# Altium PCB PCB.PcbDoc (part 3 of 3)
Units mm, origin at the board's own origin, x right, y up, seen from the top; angles counter-clockwise.
Board outline 60.66 x 261 mm, 2 copper layers (Top Layer, Bottom Layer); 258 components, 193 nets, 900 pads, 4 vias.
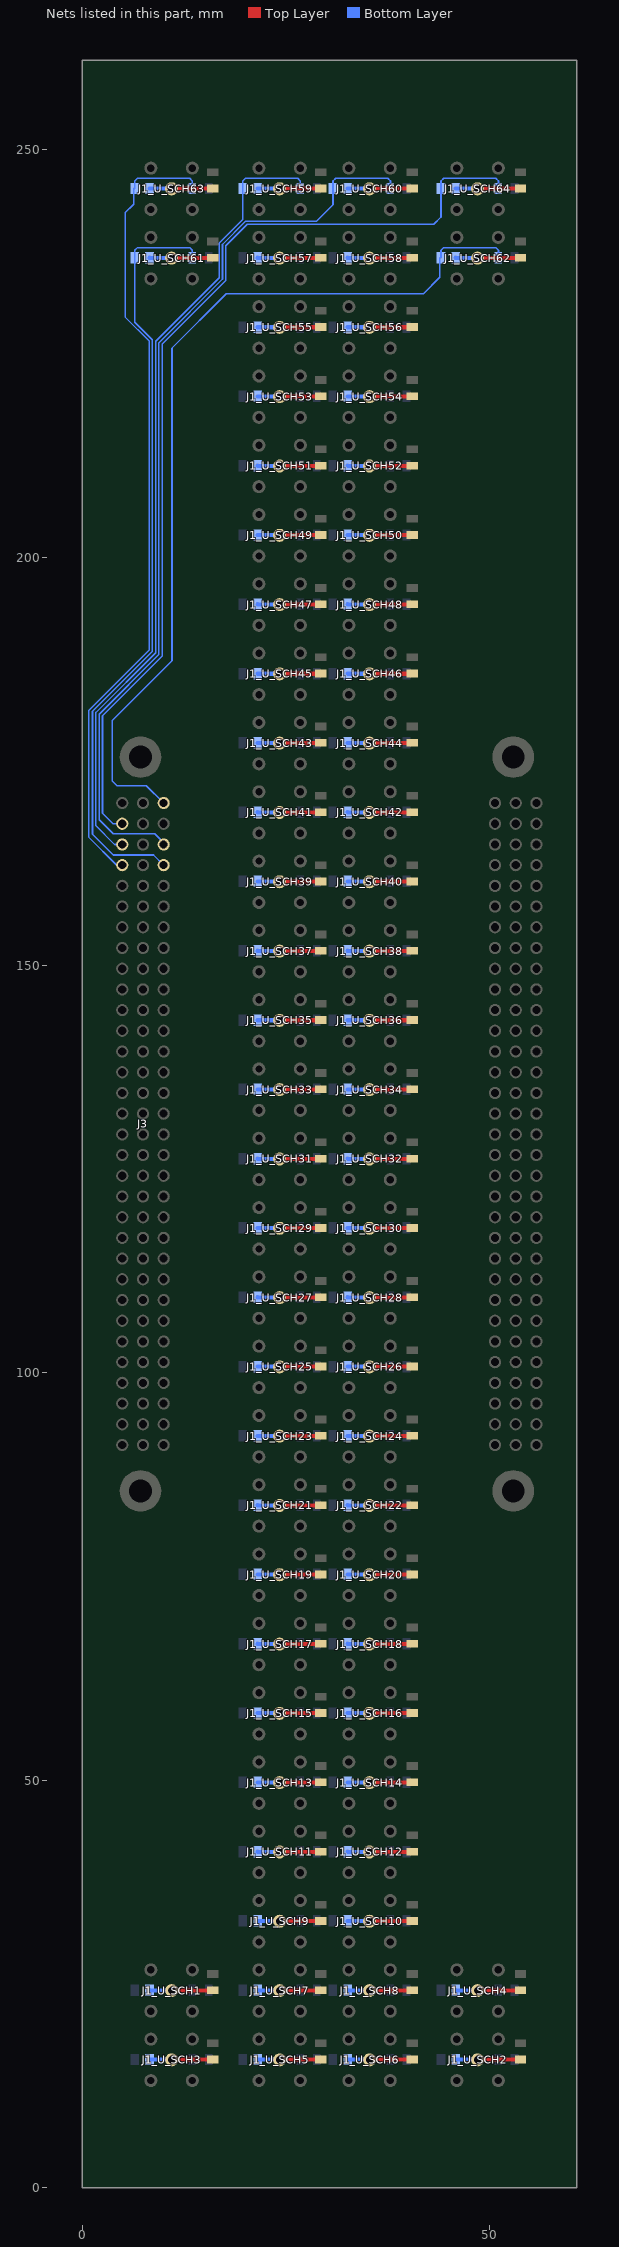
[diagram p3: the nets of this part, all layers, seen from the top]

## Via types
v1: diameter 3, hole 3, Top Layer to Bottom Layer, 4 vias

## Nets (pads, with @x,y where several pads share a name; then routed paths per layer and width w, separated by ;. In a path a pad name is that pad's centre, name@x,y a point inside that pad or via, vN(x,y) a via of type N, cw(c..) or ccw(c..) an arc to the next point about the centre after c; other vN are vias at no path point) (continued)
INPUT_T59: C1_U_SCH59.2 J3.a30 R2_U_SCH59.2 | length 99
  Bottom Layer w0.2: J3.a30@4.93,164.79 3.99,164.79 1.7,167.08 1.7,180.975 9.025,188.3 9.025,226.5 16.825,234.3 16.825,238.55 19.725,241.45 C1_U_SCH59.2@19.725,245.25 19.725,246.175 20.05,246.5 26.45,246.5 26.775,246.175 R2_U_SCH59.2@26.775,245.25
INPUT_T60: C1_U_SCH60.2 J3.c30 R2_U_SCH60.2 | length 112.9
  Bottom Layer w0.2: J3.c30@10.01,164.79 10.01,165.015 8.925,166.1 3.825,166.1 2.1,167.825 2.1,180.775 9.425,188.1 9.425,226.334 17.225,234.134 17.225,238.384 20.091,241.25 28.775,241.25 30.775,243.25 C1_U_SCH60.2@30.775,245.25 30.775,246.175 31.1,246.5 37.5,246.5 37.825,246.175 R2_U_SCH60.2@37.825,245.25
INPUT_T61: C1_U_SCH61.2 J3.c29 R2_U_SCH61.2 | length 94.1
  Bottom Layer w0.2: J3.c29@10.01,162.25 8.76,163.5 3.825,163.5 1.279,166.046 1.279,181.12 8.625,188.466 8.625,226.7 6.475,228.85 C1_U_SCH61.2@6.475,236.75 6.475,237.675 6.8,238 13.2,238 13.525,237.675 R2_U_SCH61.2@13.525,236.75
INPUT_T62: C1_U_SCH62.2 J3.c32 R2_U_SCH62.2 | length 111.6
  Bottom Layer w0.2: J3.c32@10.01,169.87 7.88,172 4.275,172 3.7,172.575 3.7,180 11.025,187.325 11.025,217.615 11.025,225.672 17.703,232.35 41.875,232.35 43.875,234.35 C1_U_SCH62.2@43.875,236.75 ; C1_U_SCH62.2@44.025,236.75 44.025,237.675 44.35,238 50.75,238 51.075,237.675 R2_U_SCH62.2@51.075,236.75
INPUT_T63: C1_U_SCH63.2 J3.a29 R2_U_SCH63.2 | length 99
  Bottom Layer w0.2: J3.a29@4.93,162.25 4.25,162.25 0.8,165.7 0.8,181.206 8.225,188.631 8.225,226.534 5.275,229.484 5.275,242.275 6.325,243.325 C1_U_SCH63.2@6.325,245.25 ; C1_U_SCH63.2@6.475,245.25 6.475,246.175 6.8,246.5 13.2,246.5 13.525,246.175 R2_U_SCH63.2@13.525,245.25
INPUT_T64: C1_U_SCH64.2 J3.a31 R2_U_SCH64.2 | length 119.4
  Bottom Layer w0.2: J3.a31@4.93,167.33 3.795,167.33 2.5,168.625 2.5,180.575 9.825,187.9 9.825,226.169 17.625,233.969 17.625,238.219 20.256,240.85 43.125,240.85 44.025,241.75 C1_U_SCH64.2@44.025,245.25 44.025,246.175 44.35,246.5 50.75,246.5 51.075,246.175 R2_U_SCH64.2@51.075,245.25
NetC1_U_SCH1_1: C1_U_SCH1.1 J1_U_SCH1.1 R1_U_SCH1.1 | length 7.9
  Top Layer w0.5: J1_U_SCH1.1@10.965,24.23 J1_U_SCH1.1@10.985,24.21 11.005,24.23 16.005,24.23 R1_U_SCH1.1@16.025,24.25
  Bottom Layer w0.5: C1_U_SCH1.1@8.275,24.25 8.295,24.23 10.965,24.23 J1_U_SCH1.1@10.985,24.21 J1_U_SCH1.1@11.025,24.25
NetC1_U_SCH2_1: C1_U_SCH2.1 J1_U_SCH2.1 R1_U_SCH2.1 | length 8
  Top Layer w0.5: J1_U_SCH2.1@48.615,15.66 48.595,15.68 48.645,15.73 53.755,15.73 R1_U_SCH2.1@53.775,15.75
  Bottom Layer w0.5: C1_U_SCH2.1@45.825,15.75 45.845,15.73 48.495,15.73 J1_U_SCH2.1@48.515,15.71 J1_U_SCH2.1@48.555,15.75
NetC1_U_SCH3_1: C1_U_SCH3.1 J1_U_SCH3.1 R1_U_SCH3.1 | length 7.9
  Top Layer w0.5: J1_U_SCH3.1@10.965,15.73 J1_U_SCH3.1@10.985,15.71 11.005,15.73 16.005,15.73 R1_U_SCH3.1@16.025,15.75
  Bottom Layer w0.5: C1_U_SCH3.1@8.275,15.75 8.295,15.73 10.965,15.73 J1_U_SCH3.1@10.985,15.71 J1_U_SCH3.1@11.025,15.75
NetC1_U_SCH4_1: C1_U_SCH4.1 J1_U_SCH4.1 R1_U_SCH4.1 | length 8
  Top Layer w0.5: J1_U_SCH4.1@48.615,24.16 48.595,24.18 48.645,24.23 53.755,24.23 R1_U_SCH4.1@53.775,24.25
  Bottom Layer w0.5: C1_U_SCH4.1@45.825,24.25 45.845,24.23 48.495,24.23 J1_U_SCH4.1@48.515,24.21 J1_U_SCH4.1@48.555,24.25
NetC1_U_SCH5_1: C1_U_SCH5.1 J1_U_SCH5.1 R1_U_SCH5.1 | length 7.9
  Top Layer w0.5: J1_U_SCH5.1@24.215,15.73 J1_U_SCH5.1@24.235,15.71 24.255,15.73 29.255,15.73 R1_U_SCH5.1@29.275,15.75
  Bottom Layer w0.5: C1_U_SCH5.1@21.525,15.75 21.545,15.73 24.215,15.73 J1_U_SCH5.1@24.235,15.71 J1_U_SCH5.1@24.275,15.75
NetC1_U_SCH6_1: C1_U_SCH6.1 J1_U_SCH6.1 R1_U_SCH6.1 | length 8
  Top Layer w0.5: J1_U_SCH6.1@35.365,15.66 35.345,15.68 35.395,15.73 40.505,15.73 R1_U_SCH6.1@40.525,15.75
  Bottom Layer w0.5: C1_U_SCH6.1@32.575,15.75 32.595,15.73 35.245,15.73 J1_U_SCH6.1@35.265,15.71 J1_U_SCH6.1@35.305,15.75
NetC1_U_SCH7_1: C1_U_SCH7.1 J1_U_SCH7.1 R1_U_SCH7.1 | length 7.9
  Top Layer w0.5: J1_U_SCH7.1@24.215,24.23 J1_U_SCH7.1@24.235,24.21 24.255,24.23 29.255,24.23 R1_U_SCH7.1@29.275,24.25
  Bottom Layer w0.5: C1_U_SCH7.1@21.525,24.25 21.545,24.23 24.215,24.23 J1_U_SCH7.1@24.235,24.21 J1_U_SCH7.1@24.275,24.25
NetC1_U_SCH8_1: C1_U_SCH8.1 J1_U_SCH8.1 R1_U_SCH8.1 | length 8
  Top Layer w0.5: J1_U_SCH8.1@35.365,24.16 35.345,24.18 35.395,24.23 40.505,24.23 R1_U_SCH8.1@40.525,24.25
  Bottom Layer w0.5: C1_U_SCH8.1@32.575,24.25 32.595,24.23 35.245,24.23 J1_U_SCH8.1@35.265,24.21 J1_U_SCH8.1@35.305,24.25
NetC1_U_SCH9_1: C1_U_SCH9.1 J1_U_SCH9.1 R1_U_SCH9.1 | length 7.9
  Top Layer w0.5: J1_U_SCH9.1@24.215,32.73 J1_U_SCH9.1@24.235,32.71 24.255,32.73 29.255,32.73 R1_U_SCH9.1@29.275,32.75
  Bottom Layer w0.5: C1_U_SCH9.1@21.525,32.75 21.545,32.73 24.215,32.73 J1_U_SCH9.1@24.235,32.71 J1_U_SCH9.1@24.275,32.75
NetC1_U_SCH10_1: C1_U_SCH10.1 J1_U_SCH10.1 R1_U_SCH10.1 | length 8
  Top Layer w0.5: J1_U_SCH10.1@35.365,32.66 35.345,32.68 35.395,32.73 40.505,32.73 R1_U_SCH10.1@40.525,32.75
  Bottom Layer w0.5: C1_U_SCH10.1@32.575,32.75 32.595,32.73 35.245,32.73 J1_U_SCH10.1@35.265,32.71 J1_U_SCH10.1@35.305,32.75
NetC1_U_SCH11_1: C1_U_SCH11.1 J1_U_SCH11.1 R1_U_SCH11.1 | length 7.9
  Top Layer w0.5: J1_U_SCH11.1@24.215,41.23 J1_U_SCH11.1@24.235,41.21 24.255,41.23 29.255,41.23 R1_U_SCH11.1@29.275,41.25
  Bottom Layer w0.5: C1_U_SCH11.1@21.525,41.25 21.545,41.23 24.215,41.23 J1_U_SCH11.1@24.235,41.21 J1_U_SCH11.1@24.275,41.25
NetC1_U_SCH12_1: C1_U_SCH12.1 J1_U_SCH12.1 R1_U_SCH12.1 | length 8
  Top Layer w0.5: J1_U_SCH12.1@35.365,41.16 35.345,41.18 35.395,41.23 40.505,41.23 R1_U_SCH12.1@40.525,41.25
  Bottom Layer w0.5: C1_U_SCH12.1@32.575,41.25 32.595,41.23 35.245,41.23 J1_U_SCH12.1@35.265,41.21 J1_U_SCH12.1@35.305,41.25
NetC1_U_SCH13_1: C1_U_SCH13.1 J1_U_SCH13.1 R1_U_SCH13.1 | length 7.9
  Top Layer w0.5: J1_U_SCH13.1@24.215,49.73 J1_U_SCH13.1@24.235,49.71 24.255,49.73 29.255,49.73 R1_U_SCH13.1@29.275,49.75
  Bottom Layer w0.5: C1_U_SCH13.1@21.525,49.75 21.545,49.73 24.215,49.73 J1_U_SCH13.1@24.235,49.71 J1_U_SCH13.1@24.275,49.75
NetC1_U_SCH14_1: C1_U_SCH14.1 J1_U_SCH14.1 R1_U_SCH14.1 | length 8
  Top Layer w0.5: J1_U_SCH14.1@35.365,49.66 35.345,49.68 35.395,49.73 40.505,49.73 R1_U_SCH14.1@40.525,49.75
  Bottom Layer w0.5: C1_U_SCH14.1@32.575,49.75 32.595,49.73 35.245,49.73 J1_U_SCH14.1@35.265,49.71 J1_U_SCH14.1@35.305,49.75
NetC1_U_SCH15_1: C1_U_SCH15.1 J1_U_SCH15.1 R1_U_SCH15.1 | length 7.9
  Top Layer w0.5: J1_U_SCH15.1@24.215,58.23 J1_U_SCH15.1@24.235,58.21 24.255,58.23 29.255,58.23 R1_U_SCH15.1@29.275,58.25
  Bottom Layer w0.5: C1_U_SCH15.1@21.525,58.25 21.545,58.23 24.215,58.23 J1_U_SCH15.1@24.235,58.21 J1_U_SCH15.1@24.275,58.25
NetC1_U_SCH16_1: C1_U_SCH16.1 J1_U_SCH16.1 R1_U_SCH16.1 | length 8
  Top Layer w0.5: J1_U_SCH16.1@35.365,58.16 35.345,58.18 35.395,58.23 40.505,58.23 R1_U_SCH16.1@40.525,58.25
  Bottom Layer w0.5: C1_U_SCH16.1@32.575,58.25 32.595,58.23 35.245,58.23 J1_U_SCH16.1@35.265,58.21 J1_U_SCH16.1@35.305,58.25
NetC1_U_SCH17_1: C1_U_SCH17.1 J1_U_SCH17.1 R1_U_SCH17.1 | length 7.9
  Top Layer w0.5: J1_U_SCH17.1@24.215,66.73 J1_U_SCH17.1@24.235,66.71 24.255,66.73 29.255,66.73 R1_U_SCH17.1@29.275,66.75
  Bottom Layer w0.5: C1_U_SCH17.1@21.525,66.75 21.545,66.73 24.215,66.73 J1_U_SCH17.1@24.235,66.71 J1_U_SCH17.1@24.275,66.75
NetC1_U_SCH18_1: C1_U_SCH18.1 J1_U_SCH18.1 R1_U_SCH18.1 | length 8
  Top Layer w0.5: J1_U_SCH18.1@35.365,66.66 35.345,66.68 35.395,66.73 40.505,66.73 R1_U_SCH18.1@40.525,66.75
  Bottom Layer w0.5: C1_U_SCH18.1@32.575,66.75 32.595,66.73 35.245,66.73 J1_U_SCH18.1@35.265,66.71 J1_U_SCH18.1@35.305,66.75
NetC1_U_SCH19_1: C1_U_SCH19.1 J1_U_SCH19.1 R1_U_SCH19.1 | length 7.9
  Top Layer w0.5: J1_U_SCH19.1@24.215,75.23 J1_U_SCH19.1@24.235,75.21 24.255,75.23 29.255,75.23 R1_U_SCH19.1@29.275,75.25
  Bottom Layer w0.5: C1_U_SCH19.1@21.525,75.25 21.545,75.23 24.215,75.23 J1_U_SCH19.1@24.235,75.21 J1_U_SCH19.1@24.275,75.25
NetC1_U_SCH20_1: C1_U_SCH20.1 J1_U_SCH20.1 R1_U_SCH20.1 | length 8
  Top Layer w0.5: J1_U_SCH20.1@35.365,75.16 35.345,75.18 35.395,75.23 40.505,75.23 R1_U_SCH20.1@40.525,75.25
  Bottom Layer w0.5: C1_U_SCH20.1@32.575,75.25 32.595,75.23 35.245,75.23 J1_U_SCH20.1@35.265,75.21 J1_U_SCH20.1@35.305,75.25
NetC1_U_SCH21_1: C1_U_SCH21.1 J1_U_SCH21.1 R1_U_SCH21.1 | length 7.9
  Top Layer w0.5: J1_U_SCH21.1@24.215,83.73 J1_U_SCH21.1@24.235,83.71 24.255,83.73 29.255,83.73 R1_U_SCH21.1@29.275,83.75
  Bottom Layer w0.5: C1_U_SCH21.1@21.525,83.75 21.545,83.73 24.215,83.73 J1_U_SCH21.1@24.235,83.71 J1_U_SCH21.1@24.275,83.75
NetC1_U_SCH22_1: C1_U_SCH22.1 J1_U_SCH22.1 R1_U_SCH22.1 | length 8
  Top Layer w0.5: J1_U_SCH22.1@35.365,83.66 35.345,83.68 35.395,83.73 40.505,83.73 R1_U_SCH22.1@40.525,83.75
  Bottom Layer w0.5: C1_U_SCH22.1@32.575,83.75 32.595,83.73 35.245,83.73 J1_U_SCH22.1@35.265,83.71 J1_U_SCH22.1@35.305,83.75
NetC1_U_SCH23_1: C1_U_SCH23.1 J1_U_SCH23.1 R1_U_SCH23.1 | length 7.9
  Top Layer w0.5: J1_U_SCH23.1@24.215,92.23 J1_U_SCH23.1@24.235,92.21 24.255,92.23 29.255,92.23 R1_U_SCH23.1@29.275,92.25
  Bottom Layer w0.5: C1_U_SCH23.1@21.525,92.25 21.545,92.23 24.215,92.23 J1_U_SCH23.1@24.235,92.21 J1_U_SCH23.1@24.275,92.25
NetC1_U_SCH24_1: C1_U_SCH24.1 J1_U_SCH24.1 R1_U_SCH24.1 | length 8
  Top Layer w0.5: J1_U_SCH24.1@35.365,92.16 35.345,92.18 35.395,92.23 40.505,92.23 R1_U_SCH24.1@40.525,92.25
  Bottom Layer w0.5: C1_U_SCH24.1@32.575,92.25 32.595,92.23 35.245,92.23 J1_U_SCH24.1@35.265,92.21 J1_U_SCH24.1@35.305,92.25
NetC1_U_SCH25_1: C1_U_SCH25.1 J1_U_SCH25.1 R1_U_SCH25.1 | length 7.9
  Top Layer w0.5: J1_U_SCH25.1@24.215,100.73 J1_U_SCH25.1@24.235,100.71 24.255,100.73 29.255,100.73 R1_U_SCH25.1@29.275,100.75
  Bottom Layer w0.5: C1_U_SCH25.1@21.525,100.75 21.545,100.73 24.215,100.73 J1_U_SCH25.1@24.235,100.71 J1_U_SCH25.1@24.275,100.75
NetC1_U_SCH26_1: C1_U_SCH26.1 J1_U_SCH26.1 R1_U_SCH26.1 | length 8
  Top Layer w0.5: J1_U_SCH26.1@35.365,100.66 35.345,100.68 35.395,100.73 40.505,100.73 R1_U_SCH26.1@40.525,100.75
  Bottom Layer w0.5: C1_U_SCH26.1@32.575,100.75 32.595,100.73 35.245,100.73 J1_U_SCH26.1@35.265,100.71 J1_U_SCH26.1@35.305,100.75
NetC1_U_SCH27_1: C1_U_SCH27.1 J1_U_SCH27.1 R1_U_SCH27.1 | length 7.9
  Top Layer w0.5: J1_U_SCH27.1@24.215,109.23 J1_U_SCH27.1@24.235,109.21 24.255,109.23 29.255,109.23 R1_U_SCH27.1@29.275,109.25
  Bottom Layer w0.5: C1_U_SCH27.1@21.525,109.25 21.545,109.23 24.215,109.23 J1_U_SCH27.1@24.235,109.21 J1_U_SCH27.1@24.275,109.25
NetC1_U_SCH28_1: C1_U_SCH28.1 J1_U_SCH28.1 R1_U_SCH28.1 | length 8
  Top Layer w0.5: J1_U_SCH28.1@35.365,109.16 35.345,109.18 35.395,109.23 40.505,109.23 R1_U_SCH28.1@40.525,109.25
  Bottom Layer w0.5: C1_U_SCH28.1@32.575,109.25 32.595,109.23 35.245,109.23 J1_U_SCH28.1@35.265,109.21 J1_U_SCH28.1@35.305,109.25
NetC1_U_SCH29_1: C1_U_SCH29.1 J1_U_SCH29.1 R1_U_SCH29.1 | length 7.9
  Top Layer w0.5: J1_U_SCH29.1@24.215,117.73 J1_U_SCH29.1@24.235,117.71 24.255,117.73 29.255,117.73 R1_U_SCH29.1@29.275,117.75
  Bottom Layer w0.5: C1_U_SCH29.1@21.525,117.75 21.545,117.73 24.215,117.73 J1_U_SCH29.1@24.235,117.71 J1_U_SCH29.1@24.275,117.75
NetC1_U_SCH30_1: C1_U_SCH30.1 J1_U_SCH30.1 R1_U_SCH30.1 | length 8
  Top Layer w0.5: J1_U_SCH30.1@35.365,117.66 35.345,117.68 35.395,117.73 40.505,117.73 R1_U_SCH30.1@40.525,117.75
  Bottom Layer w0.5: C1_U_SCH30.1@32.575,117.75 32.595,117.73 35.245,117.73 J1_U_SCH30.1@35.265,117.71 J1_U_SCH30.1@35.305,117.75
NetC1_U_SCH31_1: C1_U_SCH31.1 J1_U_SCH31.1 R1_U_SCH31.1 | length 7.9
  Top Layer w0.5: J1_U_SCH31.1@24.215,126.23 J1_U_SCH31.1@24.235,126.21 24.255,126.23 29.255,126.23 R1_U_SCH31.1@29.275,126.25
  Bottom Layer w0.5: C1_U_SCH31.1@21.525,126.25 21.545,126.23 24.215,126.23 J1_U_SCH31.1@24.235,126.21 J1_U_SCH31.1@24.275,126.25
NetC1_U_SCH32_1: C1_U_SCH32.1 J1_U_SCH32.1 R1_U_SCH32.1 | length 8
  Top Layer w0.5: J1_U_SCH32.1@35.365,126.16 35.345,126.18 35.395,126.23 40.505,126.23 R1_U_SCH32.1@40.525,126.25
  Bottom Layer w0.5: C1_U_SCH32.1@32.575,126.25 32.595,126.23 35.245,126.23 J1_U_SCH32.1@35.265,126.21 J1_U_SCH32.1@35.305,126.25
NetC1_U_SCH33_1: C1_U_SCH33.1 J1_U_SCH33.1 R1_U_SCH33.1 | length 7.9
  Top Layer w0.5: J1_U_SCH33.1@24.215,134.73 J1_U_SCH33.1@24.235,134.71 24.255,134.73 29.255,134.73 R1_U_SCH33.1@29.275,134.75
  Bottom Layer w0.5: C1_U_SCH33.1@21.525,134.75 21.545,134.73 24.215,134.73 J1_U_SCH33.1@24.235,134.71 J1_U_SCH33.1@24.275,134.75
NetC1_U_SCH34_1: C1_U_SCH34.1 J1_U_SCH34.1 R1_U_SCH34.1 | length 8
  Top Layer w0.5: J1_U_SCH34.1@35.365,134.66 35.345,134.68 35.395,134.73 40.505,134.73 R1_U_SCH34.1@40.525,134.75
  Bottom Layer w0.5: C1_U_SCH34.1@32.575,134.75 32.595,134.73 35.245,134.73 J1_U_SCH34.1@35.265,134.71 J1_U_SCH34.1@35.305,134.75
NetC1_U_SCH35_1: C1_U_SCH35.1 J1_U_SCH35.1 R1_U_SCH35.1 | length 7.9
  Top Layer w0.5: J1_U_SCH35.1@24.215,143.23 J1_U_SCH35.1@24.235,143.21 24.255,143.23 29.255,143.23 R1_U_SCH35.1@29.275,143.25
  Bottom Layer w0.5: C1_U_SCH35.1@21.525,143.25 21.545,143.23 24.215,143.23 J1_U_SCH35.1@24.235,143.21 J1_U_SCH35.1@24.275,143.25
NetC1_U_SCH36_1: C1_U_SCH36.1 J1_U_SCH36.1 R1_U_SCH36.1 | length 8
  Top Layer w0.5: J1_U_SCH36.1@35.365,143.16 35.345,143.18 35.395,143.23 40.505,143.23 R1_U_SCH36.1@40.525,143.25
  Bottom Layer w0.5: C1_U_SCH36.1@32.575,143.25 32.595,143.23 35.245,143.23 J1_U_SCH36.1@35.265,143.21 J1_U_SCH36.1@35.305,143.25
NetC1_U_SCH37_1: C1_U_SCH37.1 J1_U_SCH37.1 R1_U_SCH37.1 | length 7.9
  Top Layer w0.5: J1_U_SCH37.1@24.215,151.73 J1_U_SCH37.1@24.235,151.71 24.255,151.73 29.255,151.73 R1_U_SCH37.1@29.275,151.75
  Bottom Layer w0.5: C1_U_SCH37.1@21.525,151.75 21.545,151.73 24.215,151.73 J1_U_SCH37.1@24.235,151.71 J1_U_SCH37.1@24.275,151.75
NetC1_U_SCH38_1: C1_U_SCH38.1 J1_U_SCH38.1 R1_U_SCH38.1 | length 8
  Top Layer w0.5: J1_U_SCH38.1@35.365,151.66 35.345,151.68 35.395,151.73 40.505,151.73 R1_U_SCH38.1@40.525,151.75
  Bottom Layer w0.5: C1_U_SCH38.1@32.575,151.75 32.595,151.73 35.245,151.73 J1_U_SCH38.1@35.265,151.71 J1_U_SCH38.1@35.305,151.75
NetC1_U_SCH39_1: C1_U_SCH39.1 J1_U_SCH39.1 R1_U_SCH39.1 | length 7.9
  Top Layer w0.5: J1_U_SCH39.1@24.215,160.23 J1_U_SCH39.1@24.235,160.21 24.255,160.23 29.255,160.23 R1_U_SCH39.1@29.275,160.25
  Bottom Layer w0.5: C1_U_SCH39.1@21.525,160.25 21.545,160.23 24.215,160.23 J1_U_SCH39.1@24.235,160.21 J1_U_SCH39.1@24.275,160.25
NetC1_U_SCH40_1: C1_U_SCH40.1 J1_U_SCH40.1 R1_U_SCH40.1 | length 8
  Top Layer w0.5: J1_U_SCH40.1@35.365,160.16 35.345,160.18 35.395,160.23 40.505,160.23 R1_U_SCH40.1@40.525,160.25
  Bottom Layer w0.5: C1_U_SCH40.1@32.575,160.25 32.595,160.23 35.245,160.23 J1_U_SCH40.1@35.265,160.21 J1_U_SCH40.1@35.305,160.25
NetC1_U_SCH41_1: C1_U_SCH41.1 J1_U_SCH41.1 R1_U_SCH41.1 | length 7.9
  Top Layer w0.5: J1_U_SCH41.1@24.215,168.73 J1_U_SCH41.1@24.235,168.71 24.255,168.73 29.255,168.73 R1_U_SCH41.1@29.275,168.75
  Bottom Layer w0.5: C1_U_SCH41.1@21.525,168.75 21.545,168.73 24.215,168.73 J1_U_SCH41.1@24.235,168.71 J1_U_SCH41.1@24.275,168.75
NetC1_U_SCH42_1: C1_U_SCH42.1 J1_U_SCH42.1 R1_U_SCH42.1 | length 8
  Top Layer w0.5: J1_U_SCH42.1@35.365,168.66 35.345,168.68 35.395,168.73 40.505,168.73 R1_U_SCH42.1@40.525,168.75
  Bottom Layer w0.5: C1_U_SCH42.1@32.575,168.75 32.595,168.73 35.245,168.73 J1_U_SCH42.1@35.265,168.71 J1_U_SCH42.1@35.305,168.75
NetC1_U_SCH43_1: C1_U_SCH43.1 J1_U_SCH43.1 R1_U_SCH43.1 | length 7.9
  Top Layer w0.5: J1_U_SCH43.1@24.215,177.23 J1_U_SCH43.1@24.235,177.21 24.255,177.23 29.255,177.23 R1_U_SCH43.1@29.275,177.25
  Bottom Layer w0.5: C1_U_SCH43.1@21.525,177.25 21.545,177.23 24.215,177.23 J1_U_SCH43.1@24.235,177.21 J1_U_SCH43.1@24.275,177.25
NetC1_U_SCH44_1: C1_U_SCH44.1 J1_U_SCH44.1 R1_U_SCH44.1 | length 8
  Top Layer w0.5: J1_U_SCH44.1@35.365,177.16 35.345,177.18 35.395,177.23 40.505,177.23 R1_U_SCH44.1@40.525,177.25
  Bottom Layer w0.5: C1_U_SCH44.1@32.575,177.25 32.595,177.23 35.245,177.23 J1_U_SCH44.1@35.265,177.21 J1_U_SCH44.1@35.305,177.25
NetC1_U_SCH45_1: C1_U_SCH45.1 J1_U_SCH45.1 R1_U_SCH45.1 | length 7.9
  Top Layer w0.5: J1_U_SCH45.1@24.215,185.73 J1_U_SCH45.1@24.235,185.71 24.255,185.73 29.255,185.73 R1_U_SCH45.1@29.275,185.75
  Bottom Layer w0.5: C1_U_SCH45.1@21.525,185.75 21.545,185.73 24.215,185.73 J1_U_SCH45.1@24.235,185.71 J1_U_SCH45.1@24.275,185.75
NetC1_U_SCH46_1: C1_U_SCH46.1 J1_U_SCH46.1 R1_U_SCH46.1 | length 8
  Top Layer w0.5: J1_U_SCH46.1@35.365,185.66 35.345,185.68 35.395,185.73 40.505,185.73 R1_U_SCH46.1@40.525,185.75
  Bottom Layer w0.5: C1_U_SCH46.1@32.575,185.75 32.595,185.73 35.245,185.73 J1_U_SCH46.1@35.265,185.71 J1_U_SCH46.1@35.305,185.75
NetC1_U_SCH47_1: C1_U_SCH47.1 J1_U_SCH47.1 R1_U_SCH47.1 | length 7.9
  Top Layer w0.5: J1_U_SCH47.1@24.215,194.23 J1_U_SCH47.1@24.235,194.21 24.255,194.23 29.255,194.23 R1_U_SCH47.1@29.275,194.25
  Bottom Layer w0.5: C1_U_SCH47.1@21.525,194.25 21.545,194.23 24.215,194.23 J1_U_SCH47.1@24.235,194.21 J1_U_SCH47.1@24.275,194.25
NetC1_U_SCH48_1: C1_U_SCH48.1 J1_U_SCH48.1 R1_U_SCH48.1 | length 8
  Top Layer w0.5: J1_U_SCH48.1@35.365,194.16 35.345,194.18 35.395,194.23 40.505,194.23 R1_U_SCH48.1@40.525,194.25
  Bottom Layer w0.5: C1_U_SCH48.1@32.575,194.25 32.595,194.23 35.245,194.23 J1_U_SCH48.1@35.265,194.21 J1_U_SCH48.1@35.305,194.25
NetC1_U_SCH49_1: C1_U_SCH49.1 J1_U_SCH49.1 R1_U_SCH49.1 | length 7.9
  Top Layer w0.5: J1_U_SCH49.1@24.215,202.73 J1_U_SCH49.1@24.235,202.71 24.255,202.73 29.255,202.73 R1_U_SCH49.1@29.275,202.75
  Bottom Layer w0.5: C1_U_SCH49.1@21.525,202.75 21.545,202.73 24.215,202.73 J1_U_SCH49.1@24.235,202.71 J1_U_SCH49.1@24.275,202.75
NetC1_U_SCH50_1: C1_U_SCH50.1 J1_U_SCH50.1 R1_U_SCH50.1 | length 8
  Top Layer w0.5: J1_U_SCH50.1@35.365,202.66 35.345,202.68 35.395,202.73 40.505,202.73 R1_U_SCH50.1@40.525,202.75
  Bottom Layer w0.5: C1_U_SCH50.1@32.575,202.75 32.595,202.73 35.245,202.73 J1_U_SCH50.1@35.265,202.71 J1_U_SCH50.1@35.305,202.75
NetC1_U_SCH51_1: C1_U_SCH51.1 J1_U_SCH51.1 R1_U_SCH51.1 | length 7.9
  Top Layer w0.5: J1_U_SCH51.1@24.215,211.23 J1_U_SCH51.1@24.235,211.21 24.255,211.23 29.255,211.23 R1_U_SCH51.1@29.275,211.25
  Bottom Layer w0.5: C1_U_SCH51.1@21.525,211.25 21.545,211.23 24.215,211.23 J1_U_SCH51.1@24.235,211.21 J1_U_SCH51.1@24.275,211.25
NetC1_U_SCH52_1: C1_U_SCH52.1 J1_U_SCH52.1 R1_U_SCH52.1 | length 8
  Top Layer w0.5: J1_U_SCH52.1@35.365,211.16 35.345,211.18 35.395,211.23 40.505,211.23 R1_U_SCH52.1@40.525,211.25
  Bottom Layer w0.5: C1_U_SCH52.1@32.575,211.25 32.595,211.23 35.245,211.23 J1_U_SCH52.1@35.265,211.21 J1_U_SCH52.1@35.305,211.25
NetC1_U_SCH53_1: C1_U_SCH53.1 J1_U_SCH53.1 R1_U_SCH53.1 | length 7.9
  Top Layer w0.5: J1_U_SCH53.1@24.215,219.73 J1_U_SCH53.1@24.235,219.71 24.255,219.73 29.255,219.73 R1_U_SCH53.1@29.275,219.75
  Bottom Layer w0.5: C1_U_SCH53.1@21.525,219.75 21.545,219.73 24.215,219.73 J1_U_SCH53.1@24.235,219.71 J1_U_SCH53.1@24.275,219.75
NetC1_U_SCH54_1: C1_U_SCH54.1 J1_U_SCH54.1 R1_U_SCH54.1 | length 8
  Top Layer w0.5: J1_U_SCH54.1@35.365,219.66 35.345,219.68 35.395,219.73 40.505,219.73 R1_U_SCH54.1@40.525,219.75
  Bottom Layer w0.5: C1_U_SCH54.1@32.575,219.75 32.595,219.73 35.245,219.73 J1_U_SCH54.1@35.265,219.71 J1_U_SCH54.1@35.305,219.75
NetC1_U_SCH55_1: C1_U_SCH55.1 J1_U_SCH55.1 R1_U_SCH55.1 | length 7.9
  Top Layer w0.5: J1_U_SCH55.1@24.215,228.23 J1_U_SCH55.1@24.235,228.21 24.255,228.23 29.255,228.23 R1_U_SCH55.1@29.275,228.25
  Bottom Layer w0.5: C1_U_SCH55.1@21.525,228.25 21.545,228.23 24.215,228.23 J1_U_SCH55.1@24.235,228.21 J1_U_SCH55.1@24.275,228.25
NetC1_U_SCH56_1: C1_U_SCH56.1 J1_U_SCH56.1 R1_U_SCH56.1 | length 8
  Top Layer w0.5: J1_U_SCH56.1@35.365,228.16 35.345,228.18 35.395,228.23 40.505,228.23 R1_U_SCH56.1@40.525,228.25
  Bottom Layer w0.5: C1_U_SCH56.1@32.575,228.25 32.595,228.23 35.245,228.23 J1_U_SCH56.1@35.265,228.21 J1_U_SCH56.1@35.305,228.25
NetC1_U_SCH57_1: C1_U_SCH57.1 J1_U_SCH57.1 R1_U_SCH57.1 | length 7.9
  Top Layer w0.5: J1_U_SCH57.1@24.215,236.73 J1_U_SCH57.1@24.235,236.71 24.255,236.73 29.255,236.73 R1_U_SCH57.1@29.275,236.75
  Bottom Layer w0.5: C1_U_SCH57.1@21.525,236.75 21.545,236.73 24.215,236.73 J1_U_SCH57.1@24.235,236.71 J1_U_SCH57.1@24.275,236.75
NetC1_U_SCH58_1: C1_U_SCH58.1 J1_U_SCH58.1 R1_U_SCH58.1 | length 8
  Top Layer w0.5: J1_U_SCH58.1@35.365,236.66 35.345,236.68 35.395,236.73 40.505,236.73 R1_U_SCH58.1@40.525,236.75
  Bottom Layer w0.5: C1_U_SCH58.1@32.575,236.75 32.595,236.73 35.245,236.73 J1_U_SCH58.1@35.265,236.71 J1_U_SCH58.1@35.305,236.75
NetC1_U_SCH59_1: C1_U_SCH59.1 J1_U_SCH59.1 R1_U_SCH59.1 | length 7.9
  Top Layer w0.5: J1_U_SCH59.1@24.215,245.23 J1_U_SCH59.1@24.235,245.21 24.255,245.23 29.255,245.23 R1_U_SCH59.1@29.275,245.25
  Bottom Layer w0.5: C1_U_SCH59.1@21.525,245.25 21.545,245.23 24.215,245.23 J1_U_SCH59.1@24.235,245.21 J1_U_SCH59.1@24.275,245.25
NetC1_U_SCH60_1: C1_U_SCH60.1 J1_U_SCH60.1 R1_U_SCH60.1 | length 8
  Top Layer w0.5: J1_U_SCH60.1@35.365,245.16 35.345,245.18 35.395,245.23 40.505,245.23 R1_U_SCH60.1@40.525,245.25
  Bottom Layer w0.5: C1_U_SCH60.1@32.575,245.25 32.595,245.23 35.245,245.23 J1_U_SCH60.1@35.265,245.21 J1_U_SCH60.1@35.305,245.25
NetC1_U_SCH61_1: C1_U_SCH61.1 J1_U_SCH61.1 R1_U_SCH61.1 | length 7.9
  Top Layer w0.5: J1_U_SCH61.1@10.965,236.73 J1_U_SCH61.1@10.985,236.71 11.005,236.73 16.005,236.73 R1_U_SCH61.1@16.025,236.75
  Bottom Layer w0.5: C1_U_SCH61.1@8.275,236.75 8.295,236.73 10.965,236.73 J1_U_SCH61.1@10.985,236.71 J1_U_SCH61.1@11.025,236.75
NetC1_U_SCH62_1: C1_U_SCH62.1 J1_U_SCH62.1 R1_U_SCH62.1 | length 8
  Top Layer w0.5: J1_U_SCH62.1@48.615,236.66 48.595,236.68 48.645,236.73 53.755,236.73 R1_U_SCH62.1@53.775,236.75
  Bottom Layer w0.5: C1_U_SCH62.1@45.825,236.75 45.845,236.73 48.495,236.73 J1_U_SCH62.1@48.515,236.71 J1_U_SCH62.1@48.555,236.75
NetC1_U_SCH63_1: C1_U_SCH63.1 J1_U_SCH63.1 R1_U_SCH63.1 | length 7.9
  Top Layer w0.5: J1_U_SCH63.1@10.965,245.23 J1_U_SCH63.1@10.985,245.21 11.005,245.23 16.005,245.23 R1_U_SCH63.1@16.025,245.25
  Bottom Layer w0.5: C1_U_SCH63.1@8.275,245.25 8.295,245.23 10.965,245.23 J1_U_SCH63.1@10.985,245.21 J1_U_SCH63.1@11.025,245.25
NetC1_U_SCH64_1: C1_U_SCH64.1 J1_U_SCH64.1 R1_U_SCH64.1 | length 8
  Top Layer w0.5: J1_U_SCH64.1@48.615,245.16 48.595,245.18 48.645,245.23 53.755,245.23 R1_U_SCH64.1@53.775,245.25
  Bottom Layer w0.5: C1_U_SCH64.1@45.825,245.25 45.845,245.23 48.495,245.23 J1_U_SCH64.1@48.515,245.21 J1_U_SCH64.1@48.555,245.25
copper on no net:
  other v1: 2.39,3.1 58.27,3.1

## Polygon pours and split planes (outlines as drawn)
GND on Bottom Layer "Bottom Layer-GND" (solid, pour order 0): 0,261 60.66,261 60.66,0 0,0
GND on Top Layer "Top Layer-GND" (solid, remove dead copper, pour order 2): 0,261 60.66,261 60.66,0 0,0

## Silkscreen, mask and mechanical layers (free items; w line width, h text height)
Mechanical 1:
  lines w0.254: 2.39,3.1 58.27,3.1 ; 2.39,257.9 58.27,257.9 ; 30.33,0 30.33,3.1 ; 30.33,257.9 30.33,261 ; 45.275,221.75 45.275,186.75 45.275,31.325 46.1,30.5 ; 47,31.7 47.025,31.725 47.025,183.75 47.025,224 ; 58.825,130.5 60.125,130.5 ; 0,0 60.66,0 60.66,261 0,261 0,0

## Text inside footprints (layer, text, board x,y; h text height)
J2: Drill Drawing "PRESS-FIT TECHNOLOGY diam. 1mm +0.1 -0" at 48.645,146.62 h1 r90; Mechanical 14 "1" at 46.575,91.805 h1.2 r180; Mechanical 14 "15" at 45.175,127.265 h1.2 r180; Mechanical 14 "20" at 44.975,140.015 h1.2 r180; Mechanical 14 "25" at 44.975,152.715 h1.2 r180; Mechanical 14 "30" at 44.975,165.415 h1.2 r180; Mechanical 14 "5" at 46.1,101.965 h1.2 r180; Mechanical 14 "32" at 44.975,170.495 h1.2 r180; Mechanical 14 "10" at 45.175,114.59 h1.2 r180; Mechanical 14 "c" at 55.955,88.195 h1.2 r180; Mechanical 14 "a" at 48.699,87.17 h1.2 r180; Bottom Overlay "1" at 46.575,91.805 h1.2 r180; Bottom Overlay "15" at 45.175,127.265 h1.2 r180; Bottom Overlay "20" at 44.975,140.015 h1.2 r180; Bottom Overlay "25" at 44.975,152.715 h1.2 r180; Bottom Overlay "30" at 44.975,165.415 h1.2 r180; Bottom Overlay "5" at 46.1,101.965 h1.2 r180; Bottom Overlay "32" at 44.975,170.495 h1.2 r180; Bottom Overlay "10" at 45.175,114.59 h1.2 r180; Bottom Overlay "c" at 55.955,88.195 h1.2 r180; Bottom Overlay "a" at 48.699,87.17 h1.2 r180
J3: Drill Drawing "PRESS-FIT TECHNOLOGY diam. 1mm +0.1 -0" at 2.925,146.62 h1 r90; Mechanical 14 "1" at 0.855,91.805 h1.2 r180; Mechanical 14 "15" at -0.545,127.265 h1.2 r180; Mechanical 14 "20" at -0.745,140.015 h1.2 r180; Mechanical 14 "25" at -0.745,152.715 h1.2 r180; Mechanical 14 "30" at -0.745,165.415 h1.2 r180; Mechanical 14 "5" at 0.38,101.965 h1.2 r180; Mechanical 14 "32" at -0.745,170.495 h1.2 r180; Mechanical 14 "10" at -0.545,114.59 h1.2 r180; Mechanical 14 "c" at 10.235,88.195 h1.2 r180; Mechanical 14 "a" at 2.979,87.17 h1.2 r180; Bottom Overlay "1" at 0.855,91.805 h1.2 r180; Bottom Overlay "15" at -0.545,127.265 h1.2 r180; Bottom Overlay "20" at -0.745,140.015 h1.2 r180; Bottom Overlay "25" at -0.745,152.715 h1.2 r180; Bottom Overlay "30" at -0.745,165.415 h1.2 r180; Bottom Overlay "5" at 0.38,101.965 h1.2 r180; Bottom Overlay "32" at -0.745,170.495 h1.2 r180; Bottom Overlay "10" at -0.545,114.59 h1.2 r180; Bottom Overlay "c" at 10.235,88.195 h1.2 r180; Bottom Overlay "a" at 2.979,87.17 h1.2 r180